# Altium PCB board.PcbDoc (part 1 of 2)
Units mil, origin at the board's own origin, x right, y up, seen from the top; angles counter-clockwise.
Board outline 2780 x 1500 mil, 6 copper layers (Top Layer, Mid Layer 1, Mid Layer 2, Mid Layer 3, Mid Layer 4, Bottom Layer), stack 60.566 mil thick; 88 components, 67 nets, 504 pads, 102 vias.
Unrouted connection lines stored in the file: 21.
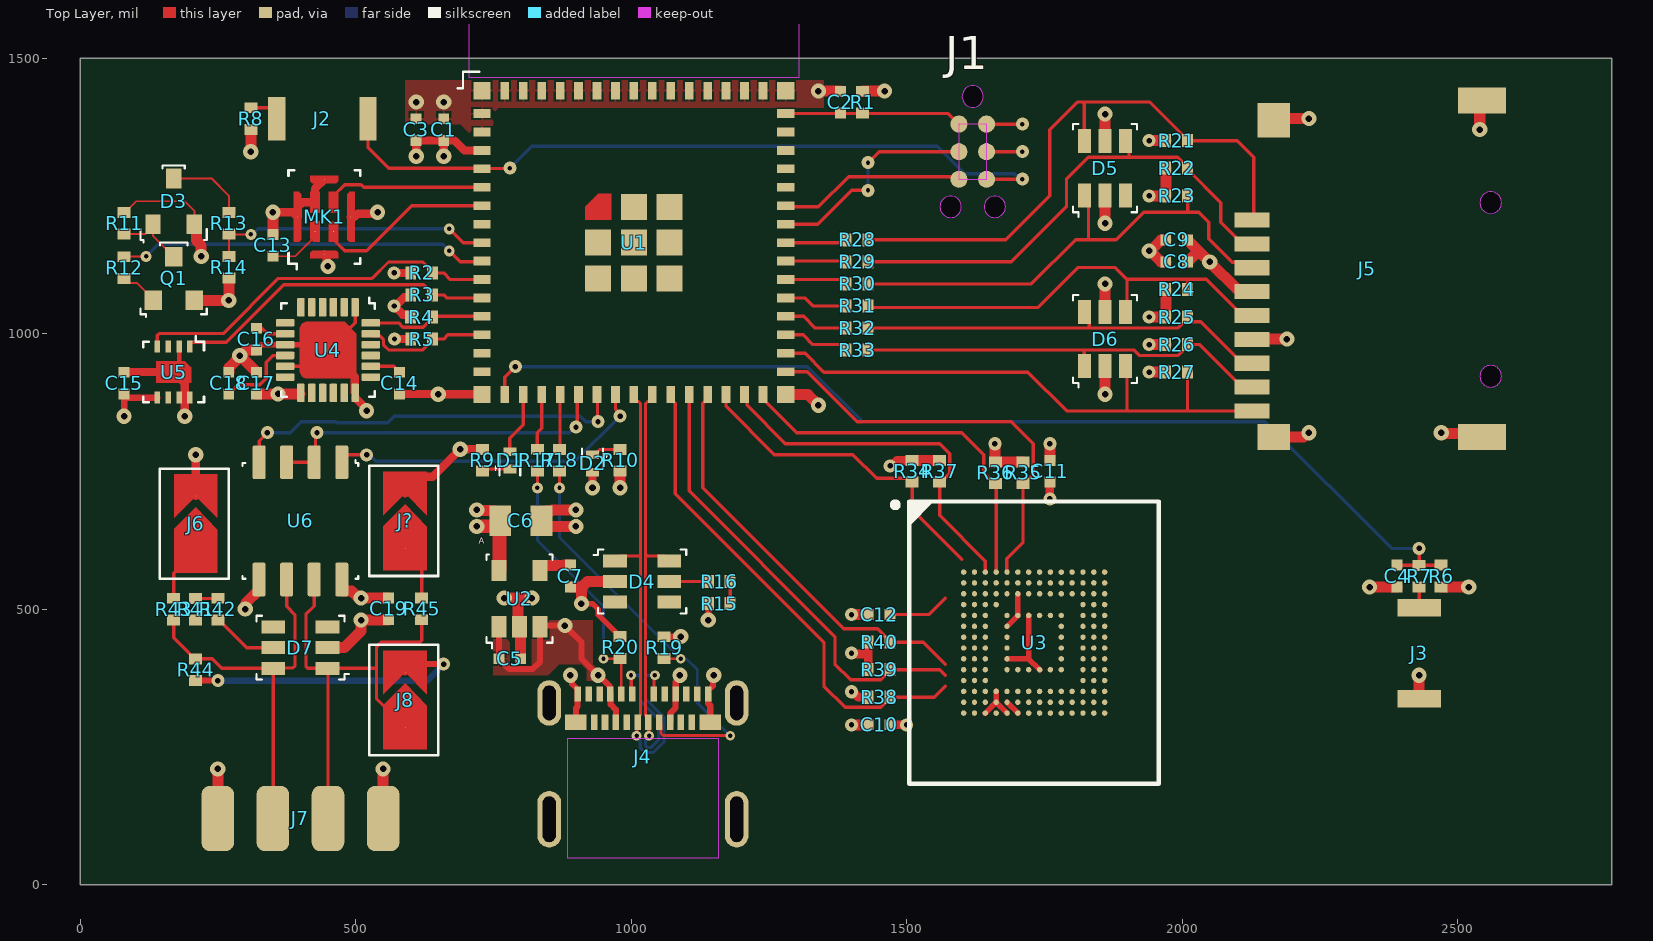
[diagram p0: Top Layer view]
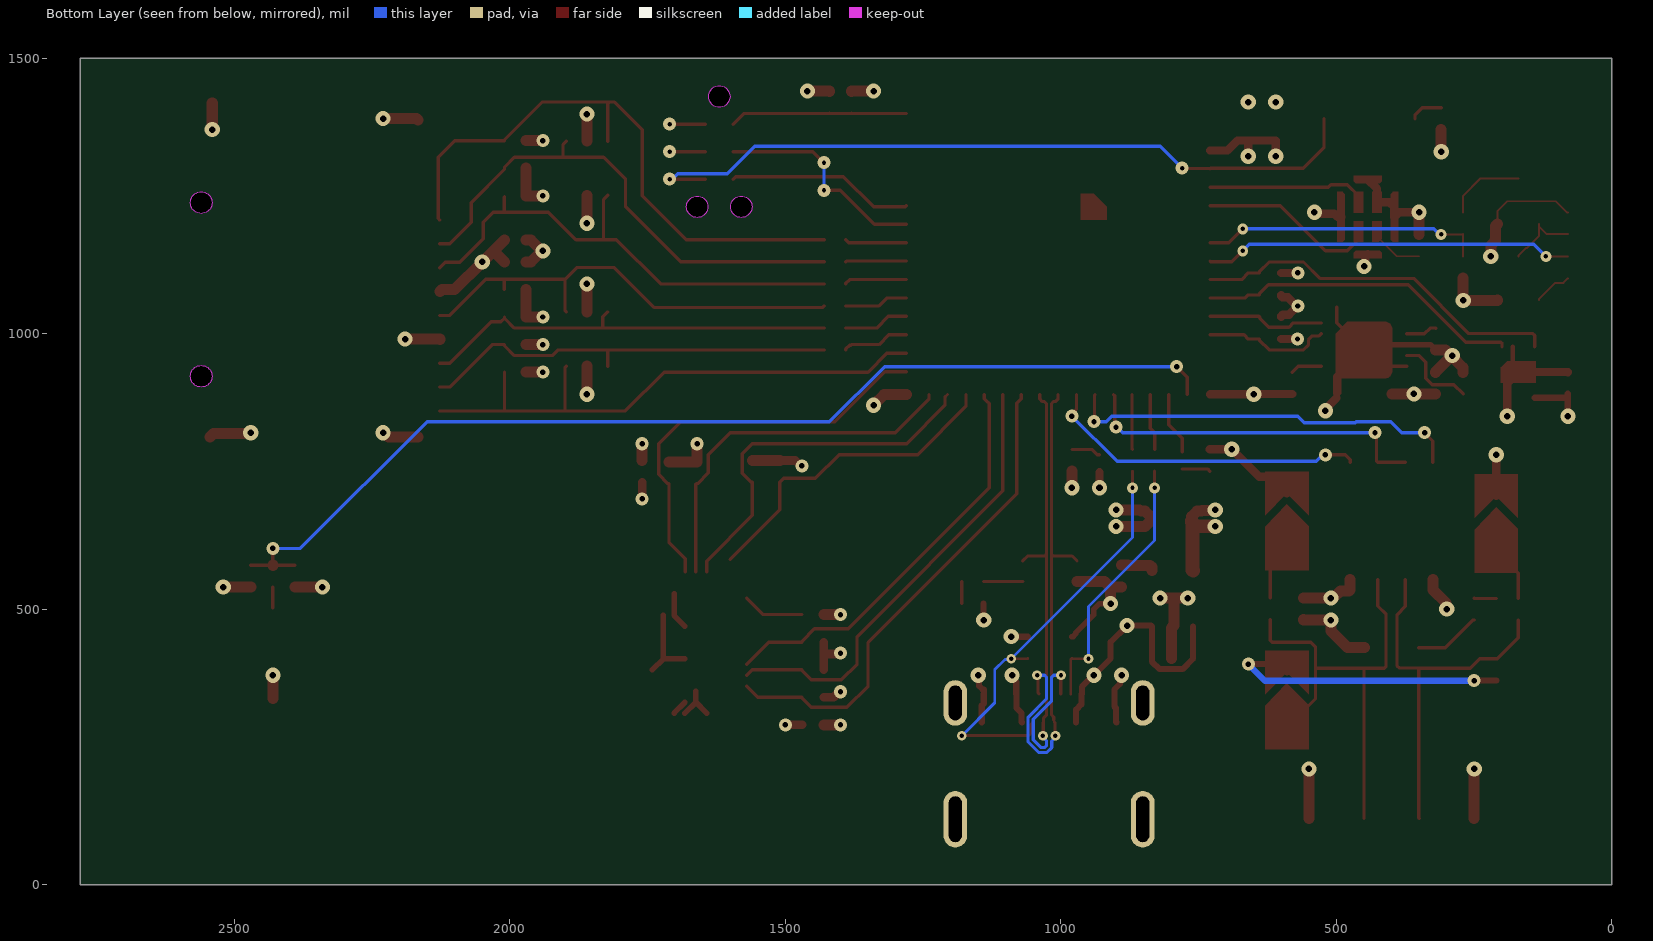
[diagram p1: Bottom Layer view, seen from below]
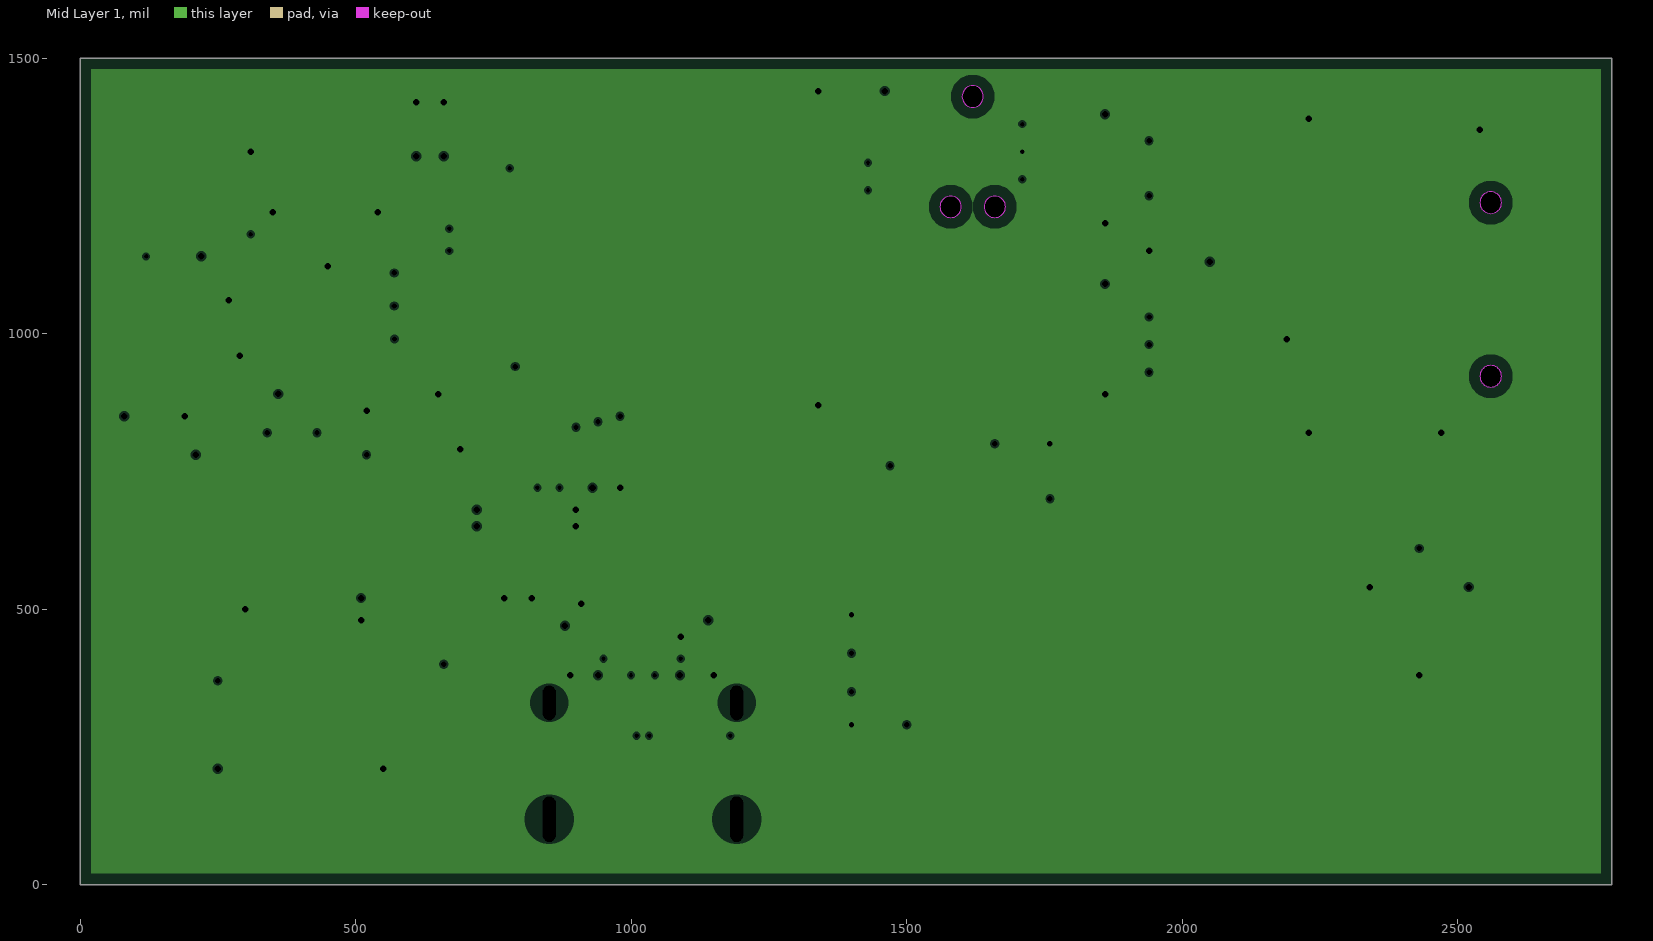
[diagram p2: Mid Layer 1, clearances drawn from the general rule]
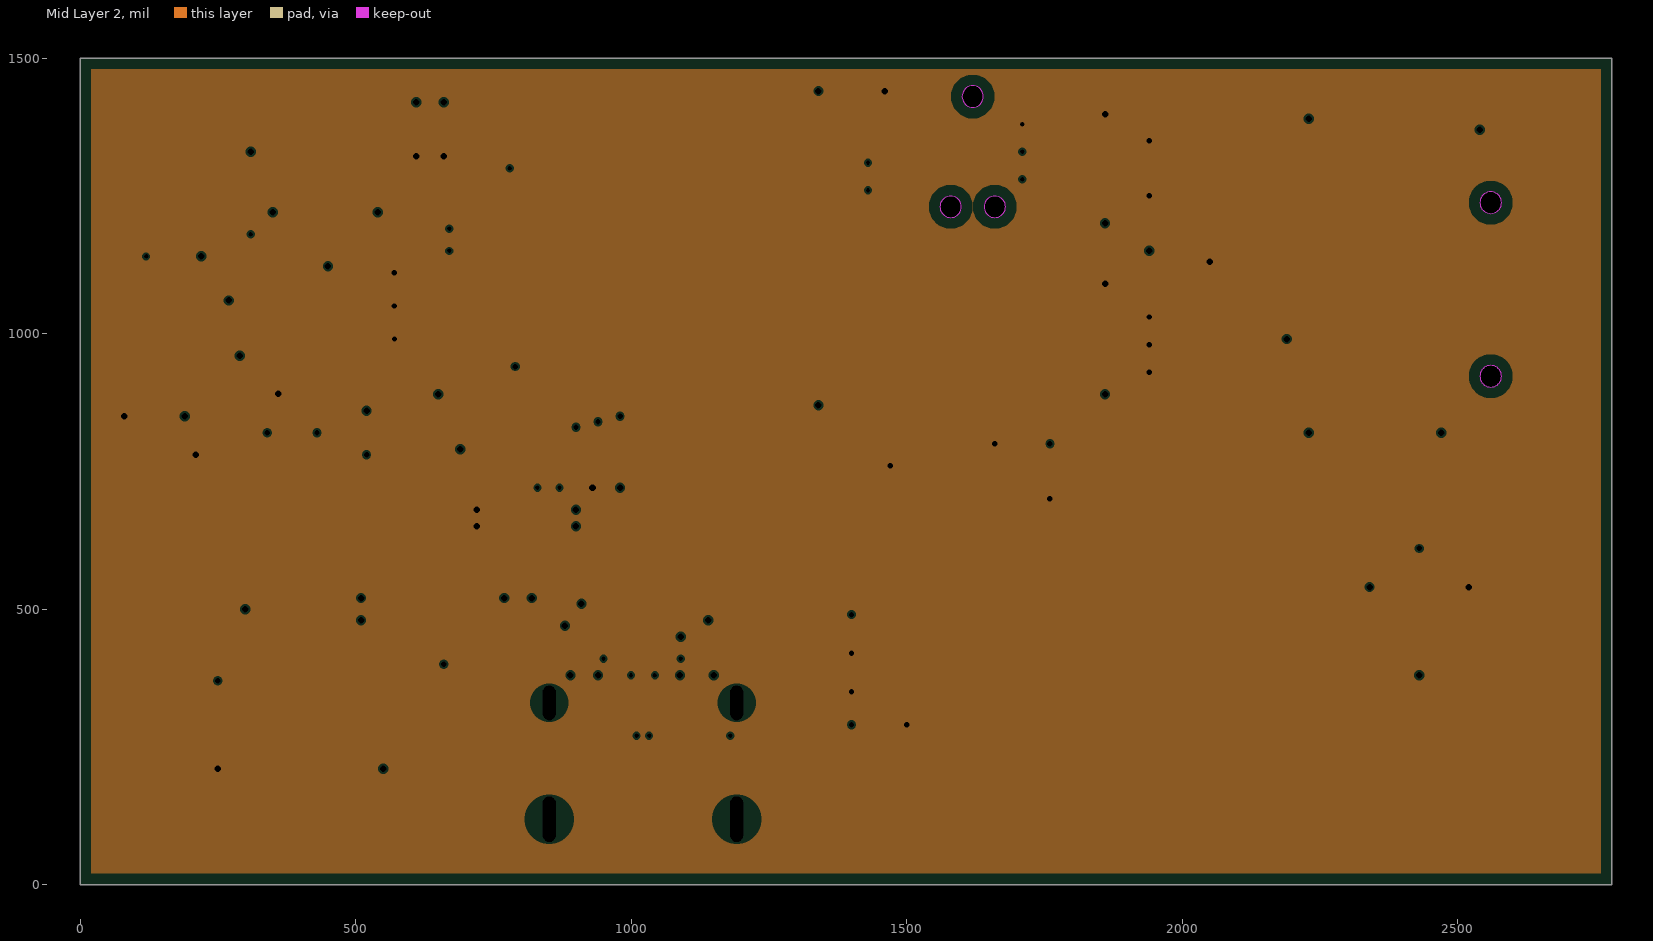
[diagram p3: Mid Layer 2, clearances drawn from the general rule]
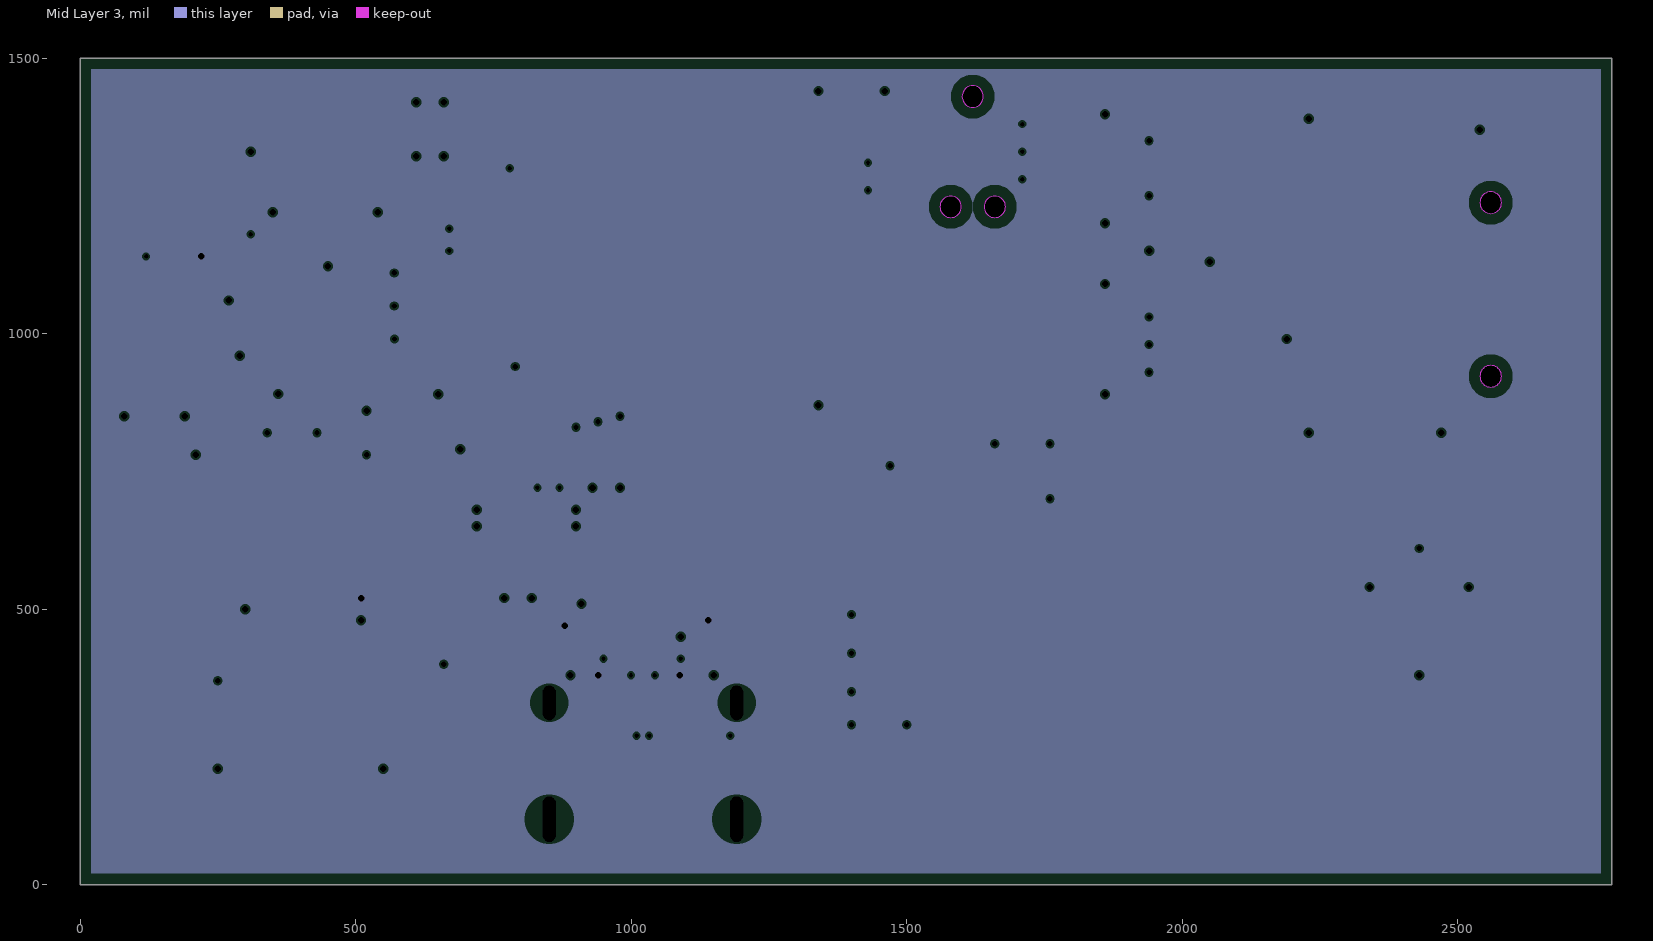
[diagram p4: Mid Layer 3, clearances drawn from the general rule]
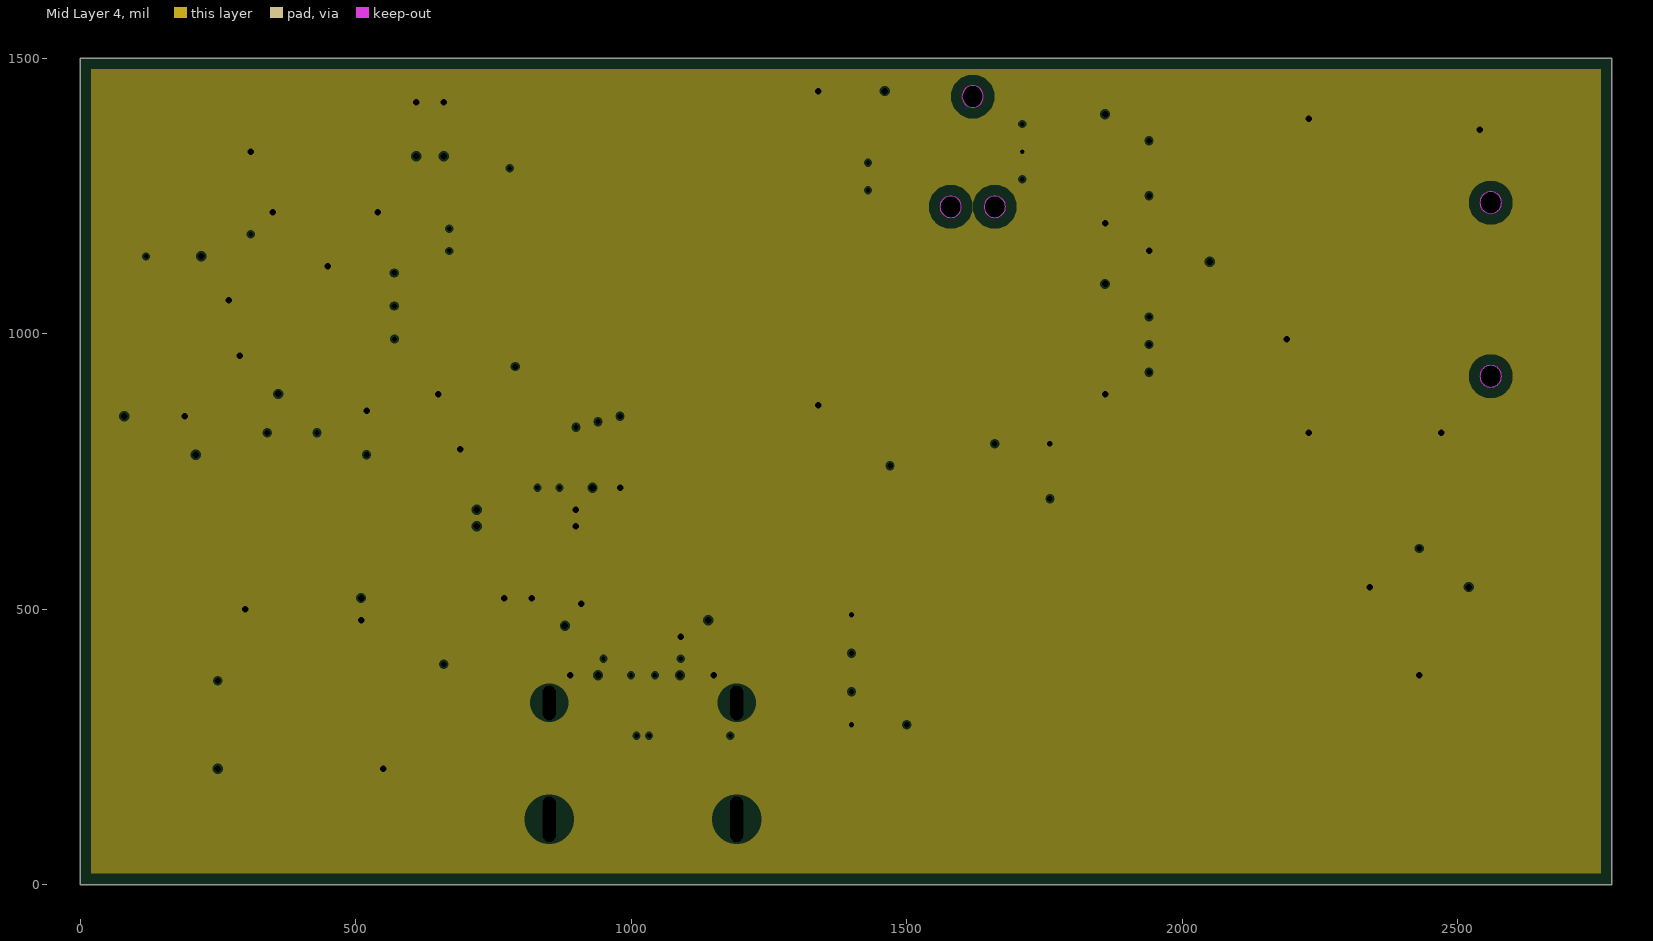
[diagram p5: Mid Layer 4, clearances drawn from the general rule]
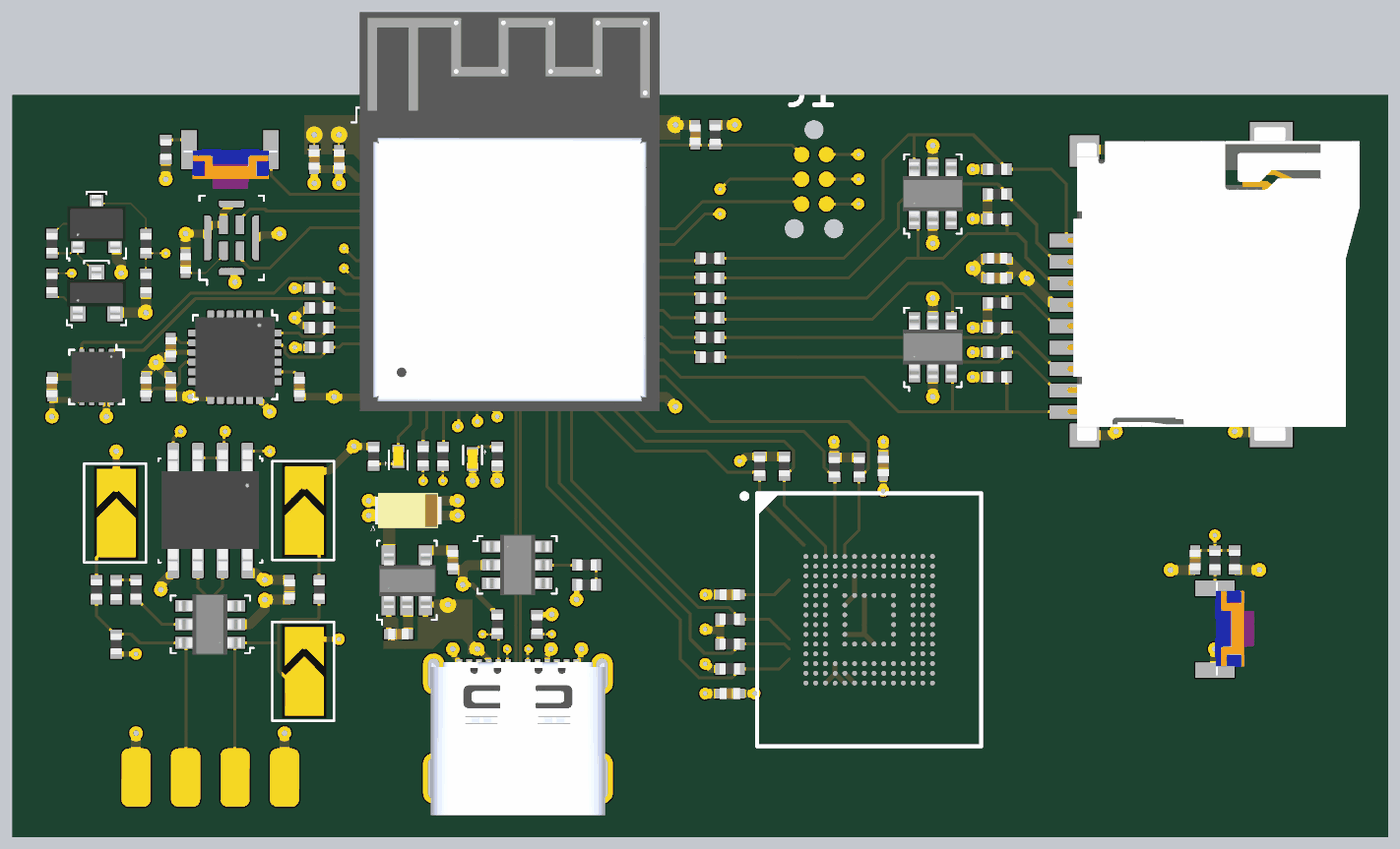
[diagram p6: 3D render of the assembled board from above, using the file's embedded part models]

## Layer stack, top to bottom
Top Solder: solder mask 0.5, Solder Resist, Dk 3.8
Top Layer: signal copper 1.378
Dielectric 1: prepreg 3.913, 2313, Dk 4.05
Mid Layer 1: plane copper 0.598, net GND
Core 1: core 21.6539, FR-4, Dk 4.5
Mid Layer 2: plane copper 0.598, net +3.3
Dielectric 2: prepreg 4.2839, 2116, Dk 4.25
Mid Layer 3: plane copper 0.598, net VBUS
Core 2: core 21.6539, FR-4, Dk 4.5
Mid Layer 4: plane copper 0.598, net GND
Dielectric 3: prepreg 3.913, 2313, Dk 4.05
Bottom Layer: signal copper 1.378
Bottom Solder: solder mask 0.5, Solder Resist, Dk 3.8

## Board outline
0,0 2780,0 2780,1500 0,1500

## Design rules (kind name [scope] priority, off if disabled: settings)
BoardOutlineClearance [All] p1: gap=7.87 ignorepadtopadclearanceinfootprint=FALSE
Clearance [All] p1: gap=3.5 ignorepadtopadclearanceinfootprint=FALSE except(5: Arc-Via Track-Via SMDPad-Via THPad-Via Via-Via Via-Fill Via-Poly Via-Region Via-Text; 9.84: Arc-Hole Track-Hole SMDPad-Hole THPad-Hole Via-Hole Fill-Hole Poly-Hole Region-Hole Text-Hole)
ComponentClearance [All] p1: gap=3.5 collisioncheckmode=3 verticalgap=3.5 showdistances=TRUE
DiffPairsRouting [All] p1: maxlimit=3.5 minlimit=3.5 mostfreqgap=3.5 toplayer_minwidth=3.5 toplayer_maxwidth=71497.94 toplayer_prefwidth=3.5 bottomlayer_minwidth=3.5 bottomlayer_maxwidth=71497.94 bottomlayer_prefwidth=3.5 maxuncoupledlength=500
Height [All] p1: minheight=0 maxheight=71497.94 prefheight=500
HoleSize [All] p1: absolutevalues=TRUE maxlimit=248.03 minlimit=7.87 maxpercent=80.000 minpercent=20.000
HoleToHoleClearance [All] p1: gap=9.84 allowstackedmicrovias=FALSE
MinimumAnnularRing [All] p1: minimumring=3
MinimumSolderMaskSliver [All] p1: minsoldermaskwidth=0
PlaneClearance [All] p1: clearance=3.5
PlaneConnect PlaneConnectPowerPads [InPadClass('PowerPads')] p1: planeconnectstyle=Direct reliefexpansion=20 reliefentries=4 reliefconductorwidth=10 reliefairgap=10
PlaneConnect [All] p2: pad.planeconnectstyle=Relief pad.reliefexpansion=11.81 pad.reliefentries=4 pad.reliefconductorwidth=3.5 pad.reliefairgap=3.5 via.planeconnectstyle=Direct via.reliefexpansion=11.81 via.reliefentries=4 via.reliefconductorwidth=5 via.reliefairgap=5
PolygonConnect PolygonConnectPowerPads [All vs (InPadClass('PowerPads'))] p1: connectstyle=Direct reliefconductorwidth=10 reliefentries=4 polygonreliefangle="90 Angle" airgapwidth=10
PolygonConnect [All] p2: thpad.connectstyle=Relief thpad.reliefconductorwidth=3.5 thpad.reliefentries=4 thpad.polygonreliefangle="90 Angle" thpad.airgapwidth=3.5 smdpad.connectstyle=Relief smdpad.reliefconductorwidth=3.5 smdpad.reliefentries=4 smdpad.polygonreliefangle="90 Angle" smdpad.airgapwidth=3.5 via.connectstyle=Direct via.reliefconductorwidth=5 via.reliefentries=4 via.polygonreliefangle="90 Angle" via.airgapwidth=5
RoutingVias [All] p1: holewidth=7.87 width=17.72 viastyle="Through Hole" minholewidth=7.87 minwidth=17.72 maxholewidth=248.03 maxwidth=257.87
SilkToSilkClearance [All] p1: silktosilkclearance=0
SilkToSolderMaskClearance [IsPad] p1: minsilkscreentomaskgap=3.5 clearancetoexposedcopper=TRUE
SolderMaskExpansion [All] p1: expansion=2.95 istentingtop=FALSE
Width [All] p1: maxlimit=71497.94 minlimit=3.5 preferedwidth=3.5
20 further rules are at their usual default settings.

## Classes and differential pairs
component class USB: D4 J4 R15 R16 R17 R18 R19 R20
component class Sensors: C14 C15 C16 C17 C18 U4 U5
component class SD-eMMC: C8 C9 C10 C11 C12 D5 D6 J5 R21 R22 R23 R24 R25 R26 R27 R28 R29 R30 R31 R32 R33 R34 R35 R36 R37 R38 R39 R40 U3
component class RS-485: C19 D7 J6 J7 J8 J? R41 R42 R43 R44 R45 U6
component class Power: C5 C6 C7 D2 D3 Q1 R10 R11 R12 R13 R14 U2
component class MIC: C13 MK1
component class MCU: C1 C2 C3 C4 D1 J1 J2 J3 R1 R2 R3 R4 R5 R6 R7 R8 R9 U1
differential pair USB_D: +USB_D_P -USB_D_N

## Components (designator, comment, footprint, x,y, rotation, side; value= is the part's Value field where it differs from the comment)
C1 "C 22u 0402 J" C0402 660,1370 r90 top
C2 "C 1uF 0402 J" C0402 1380,1420 r270 top
C3 "C 22u 0402 J" C0402 610,1370 r90 top
C4 "C 0.1u 0402 J" C0402 2390,560 r90 top
C5 "C 0.1u 0402 J" C0402 780,410 r180 top
C6 "C 1uF Tant J" "C AVX CAP TANT CASE A" 800,660 r0 top
C7 "C 10nF 0402 J" C0402 890,560 r90 top
C8 "C 22u 0402 J" C0402 1990,1130 r0 top
C9 "C 22u 0402 J" C0402 1990,1170 r0 top
C10 "C 22u 0402 J" C0402 1450,290 r0 top
C11 "C 22u 0402 J" C0402 1760,750 r270 top
C12 "C 0.1u 0402 J" C0402 1450,490 r0 top
C13 "C 22u 0402 J" C0402 350,1160 r270 top
C14 "C 2.2nF 0402 50V X7R J" C0402 580,910 r270 top
C15 "C 0.1u 0402 J" C0402 80,910 r270 top
C16 "C 0.1u 0402 J" C0402 320,990 r270 top
C17 "C 10nF 0402 J" C0402 320,910 r270 top
C18 "C 0.1u 0402 J" C0402 270,910 r270 top
C19 "C 22u 0402 J" C0402 560,500.32 r270 top
D1 "D GREEN LED J" NCD0402C1 780,770 r90 top
D2 "D GREEN LED J" NCD0402C1 930,764.25 r270 top
D3 "D MOS RQ5A025ZPTL" "SC96 SOT346T" 170,1240 r0 top
D4 "Protection diodes" SOT23-SRV05 1020,550 r270 top
D5 "Protection diodes" SOT23-SRV05 1860,1300 r0 top
D6 "Protection diodes" SOT23-SRV05 1860,990 r0 top
D7 "Protection diodes" SOT23-SRV05 400,430 r90 top
J1 "J TAG CONNECT 2030 6P" TAG-CONNECT-6 1620,1330 r270 top
J2 "J BUT 2 J" "ALPSALPINE BUTTON" 440,1390 r0 top
J3 "J BUT 2 J" "ALPSALPINE BUTTON" 2430,420 r90 top
J4 "J USB-C J" "MOLEX USB-C 1054500101" 1021.57,329.68 r0 top
J5 "J SD via JLCPCB" "SOFNG TF-15X15 SD JLCPCB" 2560,1080 r90 top
J6 "J SOLDER JUMPER" SOLDER_JUMPER 210,660 r90 top
J7 "J 4P SOLDER" "4P SOLDER BRIDGE" 400,120 r180 top
J8 "J SOLDER JUMPER" SOLDER_JUMPER 590,340 r90 top
J? "J SOLDER JUMPER" SOLDER_JUMPER 590,665 r90 top
MK1 "MK Mic I2S J" "MK WMM7040DTHN0" 443.27,1211.57 r0 top
Q1 "D MMBT2222LT1G" SOT23 170,1100 r0 top
R1 "R 10K 0402 J" R0402 1420,1420 r90 top
R2 "R 10K 0402 J" R0402 620,1110 r180 top
R3 "R 10K 0402 J" R0402 620,1070 r180 top
R4 "R 10K 0402 J" R0402 619.68,1030 r180 top
R5 "R 10K 0402 J" R0402 620,990 r180 top
R6 "R 10K 0402 J" R0402 2470,560 r270 top
R7 "R 1K 0402 J" R0402 2430,559.68 r90 top
R8 "R 10K 0402 J" R0402 310,1390 r90 top
R9 "R 150 0402 J" R0402 730,770 r270 top
R10 "R 150 0402 J" R0402 980,770 r90 top
R11 "R 10K 0402 J" R0402 80,1200 r90 top
R12 "R 1K 0402 J" R0402 80,1119.69 r270 top
R13 "R 10K 0402 J" R0402 270,1200 r90 top
R14 "R 10K 0402 J" R0402 270,1120.31 r90 top
R15 "R 49.9K 0402 J" R0402 1160,510 r180 top
R16 "R 49.9K 0402 J" R0402 1160,550 r0 top
R17 "R 0 ohm 0402 J" R0402 830,770.31 r90 top
R18 "R 0 ohm 0402 J" R0402 870,770 r90 top
R19 "R 5.1k 0402 J" R0402 1060,430 r270 top
R20 "R 5.1k 0402 J" R0402 980,430.32 r270 top
R21 "R 10K 0402 J" R0402 1990,1350 r180 top
R22 "R 10K 0402 J" R0402 1990,1300 r180 top
R23 "R 10K 0402 J" R0402 1990,1250 r180 top
R24 "R 10K 0402 J" R0402 1990,1080 r180 top
R25 "R 10K 0402 J" R0402 1990,1030 r180 top
R26 "R 10K 0402 J" R0402 1990,980 r180 top
R27 "R 10K 0402 J" R0402 1990,930 r180 top
R28 "R 15 0402 J" R0402 1410,1170 r180 top
R29 "R 15 0402 J" R0402 1410,1130 r180 top
R30 "R 15 0402 J" R0402 1410,1090 r180 top
R31 "R 15 0402 J" R0402 1410,1050 r180 top
R32 "R 15 0402 J" R0402 1410,1010 r180 top
R33 "R 15 0402 J" R0402 1410,970 r180 top
R34 "R 10K 0402 J" R0402 1510,750 r90 top
R35 "R 10K 0402 J" R0402 1711.26,747.48 r90 top
R36 "R 10K 0402 J" R0402 1661.26,747.48 r90 top
R37 "R 10K 0402 J" R0402 1560,750 r90 top
R38 "R 10K 0402 J" R0402 1450,340 r0 top
R39 "R 10K 0402 J" R0402 1450,390 r180 top
R40 "R 10K 0402 J" R0402 1450,440 r0 top
R41 "R 49.9K 0402 J" R0402 210,499.68 r270 top
R42 "R 49.9K 0402 J" R0402 250,500 r90 top
R43 "R 10K 0402 J" R0402 170,500 r90 top
R44 "R 100 0402 J" R0402 210,390 r90 top
R45 "R 10K 0402 J" R0402 620,500.32 r270 top
U1 "U ESP32-S3-MINI-1-N8" ESP-S3-MINI 1005.04,1164.96 r270 top
U2 "SPX3819M5-L-3-3/TR" SOT23-5 797.4,519.02 r0 top
U3 "U Samsung eMMC J 16Gb" BGA153C50P14X14_1150X1300X92 1731.42,439.21 r0 top
U4 "U MPU-6050 J" MPU-6050 450,970 r180 top
U5 "U SHT30-DIS-B2.5KS J" SHT30 170,930 r180 top
U6 "U RS485 MAX3485EESA+ J" "SOIC8 - V2" 400,660 r180 top

## Footprints (in the part's own frame and the unit in brackets; to place one, negate y for a bottom-side part, rotate by r counter-clockwise, add the part's x,y. Pads: shape width x height; smd on the part's side, far side on the other; paste and mask are expansions set on the pad)
"4P SOLDER BRIDGE" [mm]
  rrect50% 1.5x3 smd paste-1: 1(-3.81,0) 2(-1.27,0) 3(1.27,0) 4(3.81,0)
"ALPSALPINE BUTTON" [mm]
  rect 0.8x2 smd: 1(-2.1,0) 2(2.1,0)
  body extent -2.37,-1.45 2.43,1.45, height 2
BGA153C50P14X14_1150X1300X92 [mm] "BGA, 153-Leads, Body 11,50x13,00mmx0,92mm, Pitch 0,50mm"
  round 0.25 smd mask-0.31: A1(-3.25,3.25) A2(-2.75,3.25) A3(-2.25,3.25) A4(-1.75,3.25) A5(-1.25,3.25) A6(-0.75,3.25) A7(-0.25,3.25) A8(0.25,3.25) A9(0.75,3.25) A10(1.25,3.25) A11(1.75,3.25) A12(2.25,3.25) A13(2.75,3.25) A14(3.25,3.25) B1(-3.25,2.75) B2(-2.75,2.75) B3(-2.25,2.75) B4(-1.75,2.75) B5(-1.25,2.75) B6(-0.75,2.75) B7(-0.25,2.75) B8(0.25,2.75) B9(0.75,2.75) B10(1.25,2.75) B11(1.75,2.75) B12(2.25,2.75) B13(2.75,2.75) B14(3.25,2.75) C1(-3.25,2.25) C2(-2.75,2.25) C3(-2.25,2.25) C4(-1.75,2.25) C5(-1.25,2.25) C6(-0.75,2.25) C7(-0.25,2.25) C8(0.25,2.25) C9(0.75,2.25) C10(1.25,2.25) C11(1.75,2.25) C12(2.25,2.25) C13(2.75,2.25) C14(3.25,2.25) D1(-3.25,1.75) D2(-2.75,1.75) D3(-2.25,1.75) D4(-1.75,1.75) D12(2.25,1.75) D13(2.75,1.75) D14(3.25,1.75) E1(-3.25,1.25) E2(-2.75,1.25) E3(-2.25,1.25) E5(-1.25,1.25) E6(-0.75,1.25) E7(-0.25,1.25) E8(0.25,1.25) E9(0.75,1.25) E10(1.25,1.25) E12(2.25,1.25) E13(2.75,1.25) E14(3.25,1.25) F1(-3.25,0.75) F2(-2.75,0.75) F3(-2.25,0.75) F5(-1.25,0.75) F10(1.25,0.75) F12(2.25,0.75) F13(2.75,0.75) F14(3.25,0.75) G1(-3.25,0.25) G2(-2.75,0.25) G3(-2.25,0.25) G5(-1.25,0.25) G10(1.25,0.25) G12(2.25,0.25) G13(2.75,0.25) G14(3.25,0.25) H1(-3.25,-0.25) H2(-2.75,-0.25) H3(-2.25,-0.25) H5(-1.25,-0.25) H10(1.25,-0.25) H12(2.25,-0.25) H13(2.75,-0.25) H14(3.25,-0.25) J1(-3.25,-0.75) J2(-2.75,-0.75) J3(-2.25,-0.75) J5(-1.25,-0.75) J10(1.25,-0.75) J12(2.25,-0.75) J13(2.75,-0.75) J14(3.25,-0.75) K1(-3.25,-1.25) K2(-2.75,-1.25) K3(-2.25,-1.25) K5(-1.25,-1.25) K6(-0.75,-1.25) K7(-0.25,-1.25) K8(0.25,-1.25) K9(0.75,-1.25) K10(1.25,-1.25) K12(2.25,-1.25) K13(2.75,-1.25) K14(3.25,-1.25) L1(-3.25,-1.75) L2(-2.75,-1.75) L3(-2.25,-1.75) L12(2.25,-1.75) L13(2.75,-1.75) L14(3.25,-1.75) M1(-3.25,-2.25) M2(-2.75,-2.25) M3(-2.25,-2.25) M4(-1.75,-2.25) M5(-1.25,-2.25) M6(-0.75,-2.25) M7(-0.25,-2.25) M8(0.25,-2.25) M9(0.75,-2.25) M10(1.25,-2.25) M11(1.75,-2.25) M12(2.25,-2.25) M13(2.75,-2.25) M14(3.25,-2.25) N1(-3.25,-2.75) N2(-2.75,-2.75) N3(-2.25,-2.75) N4(-1.75,-2.75) N5(-1.25,-2.75) N6(-0.75,-2.75) N7(-0.25,-2.75) N8(0.25,-2.75) N9(0.75,-2.75) N10(1.25,-2.75) N11(1.75,-2.75) N12(2.25,-2.75) N13(2.75,-2.75) N14(3.25,-2.75) P1(-3.25,-3.25) P2(-2.75,-3.25) P3(-2.25,-3.25) P4(-1.75,-3.25) P5(-1.25,-3.25) P6(-0.75,-3.25) P7(-0.25,-3.25) P8(0.25,-3.25) P9(0.75,-3.25) P10(1.25,-3.25) P11(1.75,-3.25) P12(2.25,-3.25) P13(2.75,-3.25) P14(3.25,-3.25)
  silkscreen extent -6.52,-6.5 5.75,6.5, body extent -5.75,-6.5 5.75,6.5, height 0.92
C0402 [mm]
  rect 0.5x0.5 smd: 1(-0.5,0) 2(0.5,0)
  body extent -0.52,-0.28 0.52,0.28, height 0.56
"C AVX CAP TANT CASE A" [mm]
  rect 1x1.4 smd: A(-0.95,0) K(0.95,0)
  body extent -1.7,-0.9 1.7,0.9, height 1.85
ESP-S3-MINI [mm]
  rect 0.4x0.8 smd: 1(-5.95,-7) 2(-5.1,-7) 3(-4.25,-7) 4(-3.4,-7) 5(-2.55,-7) 6(-1.7,-7) 7(-0.85,-7) 8(0,-7) 9(0.85,-7) 10(1.7,-7) 11(2.55,-7) 12(3.4,-7) 13(4.25,-7) 14(5.1,-7) 15(5.95,-7) 31(5.95,7) 32(5.1,7) 33(4.25,7) 34(3.4,7) 35(2.55,7) 36(1.7,7) 37(0.85,7) 38(0,7) 39(-0.85,7) 40(-1.7,7) 41(-2.55,7) 42(-3.4,7) 43(-4.25,7) 44(-5.1,7) 45(-5.95,7)
  rect 0.8x0.4 smd: 16(7,-5.95) 17(7,-5.1) 18(7,-4.25) 19(7,-3.4) 20(7,-2.55) 21(7,-1.7) 22(7,-0.85) 23(7,0) 24(7,0.85) 25(7,1.7) 26(7,2.55) 27(7,3.4) 28(7,4.25) 29(7,5.1) 30(7,5.95) 46(-7,4.25) 46(-7,5.1) 46(-7,5.95) 46(-7,-3.4) 46(-7,-2.55) 46(-7,-1.7) 46(-7,-0.85) 46(-7,0) 46(-7,0.85) 46(-7,1.7) 46(-7,2.55) 46(-7,3.4) 46(-7,-5.95) 46(-7,-5.1) 46(-7,-4.25)
  rect 1.2x1.2 smd: 61(-1.65,1.65) 61(-1.65,0) 61(0,1.65) 61(0,0) 61(0,-1.65) 61(1.65,1.65) 61(1.65,0) 61(1.65,-1.65)
  round 0.025 smd: 61(-1.65,-1.65)
  rect 0.8x0.8 smd: 62(-7,7) 62(-7,-7) 62(7,7) 62(7,-7)
  Top Layer region: -2.25,-1.651 -1.651,-2.25 -1.05,-2.25 -1.05,-1.05 -2.25,-1.05
  Top Layer keep-out region: -12.7,-7.62 -7.62,-7.62 -7.62,7.62 -12.7,7.62
  silkscreen extent -7.87,-8.13 -7.11,-7.11, body extent -12.78,-7.7 7.73,7.7, height 2.55
"MK WMM7040DTHN0" [mil]
  round 1 smd: 1(-16.73,-26.57) 2(-16.73,26.57) 3(16.73,26.57) 4(16.73,-26.57) 5(0,-67.91) 6(-48.23,0) 7(0,67.91) 8(48.23,0)
  Top Layer region: -25.59,7.87 -25.59,45.28 -7.87,45.28 -7.87,7.87
  Top Layer region: -45.34,-45.28 -41.38,-41.32 -41.34,-41.32 -41.34,41.21 -45.34,45.17 -45.34,45.28 -55.12,45.28 -55.12,-45.28
  Top Layer region: 25.59,64.92 21.61,60.94 21.59,61.02 -21.78,61.02 -25.59,64.89 -25.59,74.8 25.59,74.8
  Top Layer region: 45.34,-45.28 41.38,-41.32 41.34,-41.32 41.34,41.21 45.34,45.17 45.34,45.28 55.12,45.28 55.12,-45.28
  Top Layer region: 25.59,-64.92 21.61,-60.94 21.59,-61.02 -21.78,-61.02 -25.59,-64.89 -25.59,-74.8 25.59,-74.8
  Top Layer region: 7.87,7.87 7.87,45.28 25.59,45.28 25.59,7.87
  Top Layer region: -25.59,-39.41 -20,-45.28 -7.87,-45.28 -7.87,-7.87 -25.59,-7.87 -25.59,-7.87
  Top Layer region: 7.87,-45.28 7.87,-7.87 25.59,-7.87 25.59,-45.28
  silkscreen extent -65,-95 65,85, body extent -60,-80 60,80, height 39
"MOLEX USB-C 1054500101" [mm]
  rrect100% 1.1x2.6 hole 0.6 slot 2.1 at 90 deg: 99(-4.32,-5.36) 99(4.32,-5.36)
  rrect100% 1.1x2.1 hole 0.6 slot 1.6 at 90 deg: 99(-4.32,0) 99(4.32,0)
  rect 0.3x0.7 smd: A1(-3,0.41) A2(-2.5,0.41) A3(-2,0.41) A4(-1.5,0.41) A5(-1,0.41) A6(-0.5,0.41) A7(0.5,0.41) A8(1,0.41) A9(1.5,0.41) A10(2,0.41) A11(2.5,0.41) A12(3,0.41) B2(2.25,-0.89) B3(1.75,-0.89) B4(1.25,-0.89) B5(0.75,-0.89) B6(0.25,-0.89) B7(-0.25,-0.89) B8(-0.75,-0.89) B9(-1.25,-0.89) B10(-1.75,-0.89) B11(-2.25,-0.89)
  rect 1x0.7 smd: B1(3.1,-0.89) B12(-3.1,-0.89)
  Top Layer keep-out region: -3.5,-7.13 3.5,-7.13 3.5,-1.651 -3.5,-1.651
  body extent -4.47,-7.26 4.47,0.64, height 3.2
MPU-6050 [mm]
  rrect25% 0.35x0.85 smd: 1(-1.25,-1.975) 2(-0.75,-1.975) 3(-0.25,-1.975) 4(0.25,-1.975) 5(0.75,-1.975) 6(1.25,-1.975) 13(1.25,1.975) 14(0.75,1.975) 15(0.25,1.975) 16(-0.25,1.975) 17(-0.75,1.975) 18(-1.25,1.975)
  rrect25% 0.85x0.35 smd: 7(1.975,-1.25) 8(1.975,-0.75) 9(1.975,-0.25) 10(1.975,0.25) 11(1.975,0.75) 12(1.975,1.25) 19(-1.973,1.25) 20(-1.973,0.75) 21(-1.973,0.25) 22(-1.973,-0.25) 23(-1.973,-0.75) 24(-1.973,-1.25)
  round 0.025 smd paste-2539.97 mask+0.102: 25(0,0)
  Top Layer region: -0.762,-1.3 -1.3,-0.762 -1.3,0.975 -1.275,1.099 -1.205,1.205 -1.099,1.275 -0.975,1.3 -0.975,1.3 0.975,1.3 1.099,1.275 1.205,1.205 1.275,1.099 1.3,0.975 1.3,0.975 1.3,-0.975 1.275,-1.099 1.205,-1.205 1.099,-1.275 0.975,-1.3 0.975,-1.3
  silkscreen extent -2.16,-2.41 2.16,2.16, body extent -2.05,-2.05 2.04,2.04, height 0.94
NCD0402C1 [mm]
  rect 0.4x0.6 smd: 1(-0.4,0) 2(0.4,0)
  silkscreen extent -0.69,-0.48 0.28,0.7, body extent -0.5,-0.25 0.5,0.25, height 0.32
R0402 [mm]
  rect 0.5x0.6 smd: 1(-0.5,0) 2(0.5,0)
  body extent -0.52,-0.28 0.52,0.28, height 0.41
"SC96 SOT346T" [mm]
  rect 0.7x0.9 smd: 1(-0.95,-1.05) 2(0.95,-1.05) 3(0,1.05)
  silkscreen extent -1.52,-1.91 1.52,1.65, body extent -1.5,-1.5 1.5,1.5, height 0.99
SHT30 [mm]
  rect 0.25x0.55 smd: 1(-0.75,-1.175) 2(-0.25,-1.175) 3(0.25,-1.175) 4(0.75,-1.175) 5(0.75,1.175) 6(0.25,1.175) 7(-0.25,1.175) 8(-0.75,1.175)
  round 0.025 smd: DP(0,0)
  Top Layer region: -0.8,-0.229 -0.787,-0.229 -0.508,-0.5 0.8,-0.5 0.8,0.5 -0.8,0.5
  silkscreen extent -1.4,-1.65 1.4,1.4, body extent -1.31,-1.3 1.28,1.29, height 0.99
"SOFNG TF-15X15 SD JLCPCB" [mm]
  rect 0.7x1.6 smd: 1(3.2,11) 2(2.1,11) 3(1,11) 4(-0.1,11) 5(-1.2,11) 6(-2.3,11) 7(-3.4,11) 8(-4.5,11) Cd(-5.6,11)
  rect 1.2x2.2 smd: CASE(-6.8,0.4) CASE(8.7,0.4)
  rect 1.2x1.5 smd: CASE(-6.8,10)
  rect 1.6x1.5 smd: CASE(7.8,10)
  Keep-Out Layer board cut-out: -4.5,0 -4.462,-0.191 -4.354,-0.354 -4.191,-0.462 -4,-0.5 -4,-0.5 -3.809,-0.462 -3.646,-0.354 -3.538,-0.191 -3.5,0 -3.5,0 -3.538,0.191 -3.646,0.354 -3.809,0.462 -4,0.5 -4,0.5 -4.191,0.462 -4.354,0.354 -4.462,0.191 -4.5,0
  Keep-Out Layer board cut-out: 3.5,0 3.538,-0.191 3.646,-0.354 3.809,-0.462 4,-0.5 4,-0.5 4.191,-0.462 4.354,-0.354 4.462,-0.191 4.5,0 4.5,0 4.462,0.191 4.354,0.354 4.191,0.462 4,0.5 4,0.5 3.809,0.462 3.646,0.354 3.538,0.191 3.5,0
  body extent -7.08,-4.12 9.02,10.88, height 1.93
"SOIC8 - V2" [mm]
  rrect25% 0.6x1.55 smd: 1(-1.905,-2.7) 2(-0.635,-2.7) 3(0.635,-2.7) 4(1.905,-2.7) 5(1.905,2.7) 6(0.635,2.7) 7(-0.635,2.7) 8(-1.905,2.7)
  silkscreen extent -2.67,-2.79 2.67,2.67, body extent -2.5,-3.11 2.51,3.08, height 1.76
SOLDER_JUMPER [mil]
  round 1 smd paste-99999: 1(-55,0) 2(45,0)
  Top Layer region: 5.63,39.37 45,0 5.63,-39.37 84.37,-39.37 84.37,39.37
  Top Layer region: -14.37,39.37 25,0 -15.63,-39.37 -94.37,-39.37 -94.37,39.37 -94.37,39.37
  silkscreen extent -105,-60 95,65
SOT23 [mm]
  rect 0.8x0.9 smd: 1(-0.95,-1) 2(0.95,-1) 3(0,1)
  silkscreen extent -1.52,-1.78 1.52,1.65, body extent -1.52,-1.32 1.52,1.32, height 1.12
SOT23-5 [mm]
  rect 0.69x0.99 smd: 1(-0.95,-1.295) 2(0,-1.295) 3(0.95,-1.295) 4(0.95,1.295) 5(-0.95,1.295)
  silkscreen extent -1.52,-2.29 1.52,2.03, body extent -1.43,-1.42 1.46,1.37, height 1.45
SOT23-SRV05 [mm]
  rect 0.6x1.1 smd: 1(-0.95,-1.25) 2(0,-1.25) 3(0.95,-1.25) 4(0.95,1.25) 5(0,1.25) 6(-0.95,1.25)
  silkscreen extent -1.47,-2.24 1.47,2.03, body extent -1.55,-1.58 1.55,1.62, height 1.45
TAG-CONNECT-6 [mil]
  round 30.98 smd paste-39.37: 1(-50,-25) 2(-50,25) 3(0,-25) 4(0,25) 5(50,-25) 6(50,25)
  Top Layer keep-out region: -50,-25 50,-25 50,25 -50,25
  Keep-Out Layer board cut-out: 80.49,-40 81.98,-47.47 86.21,-53.79 92.53,-58.02 100,-59.51 100,-59.51 107.47,-58.02 113.79,-53.79 118.02,-47.47 119.51,-40 119.51,-40 118.02,-32.53 113.79,-26.21 107.47,-21.98 100,-20.49 100,-20.49 92.53,-21.98 86.21,-26.21 81.98,-32.53 80.49,-40
  Keep-Out Layer board cut-out: 80.49,40 81.98,32.53 86.21,26.21 92.53,21.98 100,20.49 100,20.49 107.47,21.98 113.79,26.21 118.02,32.53 119.51,40 119.51,40 118.02,47.47 113.79,53.79 107.47,58.02 100,59.51 100,59.51 92.53,58.02 86.21,53.79 81.98,47.47 80.49,40
  Keep-Out Layer board cut-out: -119.51,0 -118.02,-7.47 -113.79,-13.79 -107.47,-18.02 -100,-19.51 -100,-19.51 -92.53,-18.02 -86.21,-13.79 -81.98,-7.47 -80.49,0 -80.49,0 -81.98,7.47 -86.21,13.79 -92.53,18.02 -100,19.51 -100,19.51 -107.47,18.02 -113.79,13.79 -118.02,7.47 -119.51,0

## Part data
C1 C3 C8 C9 C10 C11 C13 C19: "Multi-Layer Ceramic Capacitor 22uF 2.5VDC X6S 20% 0402 Paper T/R GRM155C80E226ME11D", JLCPCB=C907955, Manufacturer=Murata, Manufacturer Part Number=GRM155C80E226ME11D, Supplier Part Number 1=81-GRM155C80E226ME1D, Category="Ceramic Capacitors", Pricing 1="1=0,32000, 10=0,22300, 50=0,22300, 100=0,13400, 1000=0,08500, 10000=0,06900 (USD)", RoHS=Yes, Stock 1=30000, Supplier 1=Mouser
C2: "Ceramic capacitor SMD 0402 - 1000nF, 10V, +-10%, X5R CL05A105KP5NNNC", Capacitance=1uF, Case Code (Imperial)=0402, Case Code (Metric)=1005, Dielectric=X5R, JLCPCB=C14445, Manufacturer=Samsung, Manufacturer Part Number=CL05A105KP5NNNC, Max Operating Temperature=85°C, Min Operating Temperature=-55°C, Package Quantity=1, Tolerance=10%, Voltage Rating=10V, Case/Package=0402, Category="Ceramic Capacitors", ComponentLink1Description=http://www.farnell.com/datasheets/2710650.pdf?src-supplier=Farnell, ComponentLink1URL=http://www.farnell.com/datasheets/2710650.pdf?src-supplier=Farnell, ComponentLink2Description=http://www.samsungsem.com/kr/support/product-search/mlcc/CL05A105KP5NNNC.jsp?src-supplier=Digi-Key, ComponentLink2URL=http://www.samsungsem.com/kr/support/product-search/mlcc/CL05A105KP5NNNC.jsp?src-supplier=Digi-Key, ComponentLink3Description=http://www.farnell.com/datasheets/2710650.pdf?src-supplier=Element14, ComponentLink3URL=http://www.farnell.com/datasheets/2710650.pdf?src-supplier=Element14, Contact Plating=Tin, Depth=0.5mm, Height=0.5mm, Length=1mm, Material=Ceramic, Mount="Surface Mount", Packaging="Tape and Reel", Pricing 1="1=0,06300, 10=0,04210, 25=0,03040, 100=0,01620, 500=0,01020 (USD)", Pricing 2="1=0,10000, 10=0,03600, 50=0,01960, 100=0,01610, 500=0,01148, 1000=0,00903, 2500=0,00821, 5000=0,00755 (USD)", Pricing 3="1=0,10000, 10=0,02200, 50=0,02200, 100=0,01700, 500=0,01300, 1000=0,01000, 2500=0,00900, 10000=0,00600, 50000=0,00500 (USD)", Radiation Hardening=No, RoHS=Yes, RoHS Compliant=Yes, Series=CL, Stock 1=131, Stock 2=6411089, Stock 3=1468368, Supplier 1="Arrow Electronics", Supplier 2=Digi-Key, Supplier 3=Mouser, Supplier Part Number 1=CL05A105KP5NNNC, Supplier Part Number 2=1276-1076-1-ND, Supplier Part Number 3=187-CL05A105KP5NNNC, Thickness=0.022inch, Width=0.02inch
C4 C5 C12 C15 C16 C18: "Cap Ceramic 0.1uF 50V X7R 10% Pad SMD 0402 125C Low ESR Automotive CL05B104KB54PNC", Manufacturer=Samsung, Manufacturer Part Number=CL05B104KB54PNC, Supplier Part Number 1=1276-CL05B104KB54PNCCT-ND, Category="Ceramic Capacitors", Pricing 1="1=0,10000, 10=0,04600, 50=0,02500, 100=0,02040, 500=0,01460, 1000=0,01147, 2500=0,01043, 5000=0,00959 (USD)", RoHS=Yes, RoHS Compliant=Yes, Stock 1=3863336, Supplier 1=Digi-Key
C6: "Cap Tant Solid 1uF 16V A CASE 10%( 3.2 X 1.6 X 1.6mm) Inward L SMD 3216-18 11 Ohm 125C T/R TAJA105K016RNJ", Capacitance=1uF, Case Code (Imperial)=1206, Case Code (Metric)=3216, Dielectric Material=Tantalum, ESR (Equivalent Series Resistance)=11R, JLCPCB=C7174, Leakage Current=500nA, Manufacturer="Kyocera AVX", Manufacturer Part Number=TAJA105K016RNJ, Max Operating Temperature=125°C, Min Operating Temperature=-55°C, Package Quantity=1, Supplier Part Number 1=478-1649-2-ND, Tolerance=20%, Voltage=16V, Case/Package=1206, Category="Tantalum Capacitors", ComponentLink1Description=https://datasheet.ciiva.com/18710/taj-eng-18710647.pdf?src-supplier=Distrelec, ComponentLink1URL=https://datasheet.ciiva.com/18710/taj-eng-18710647.pdf?src-supplier=Distrelec, ComponentLink2Description=https://datasheet.ciiva.com/7832/taj-7832811.pdf?src-supplier=Element14, ComponentLink2URL=https://datasheet.ciiva.com/7832/taj-7832811.pdf?src-supplier=Element14, ComponentLink3Description=https://datasheet.ciiva.com/7832/taj-7832810.pdf?src-supplier=Element14, ComponentLink3URL=https://datasheet.ciiva.com/7832/taj-7832810.pdf?src-supplier=Element14, ComponentLink4Description=https://datasheet.ciiva.com/7832/1680476-7832431.pdf?src-supplier=Element14, ComponentLink4URL=https://datasheet.ciiva.com/7832/1680476-7832431.pdf?src-supplier=Element14, ComponentLink5Description=https://datasheet.ciiva.com/263/taj-263410.pdf?src-supplier=Digi-Key, ComponentLink5URL=https://datasheet.ciiva.com/263/taj-263410.pdf?src-supplier=Digi-Key, ComponentLink6Description=https://datasheet.ciiva.com/263/taj-263409.pdf?src-supplier=Digi-Key, ComponentLink6URL=https://datasheet.ciiva.com/263/taj-263409.pdf?src-supplier=Digi-Key, ComponentLink7Description=https://datasheet.ciiva.com/263/taj-263411.pdf?src-supplier=Digi-Key, ComponentLink7URL=https://datasheet.ciiva.com/263/taj-263411.pdf?src-supplier=Digi-Key, ComponentLink8Description=https://datasheet.ciiva.com/7832/1703059-7832429.pdf?src-supplier=Element14, ComponentLink8URL=https://datasheet.ciiva.com/7832/1703059-7832429.pdf?src-supplier=Element14, ComponentLink9Description=https://datasheet.ciiva.com/7832/1703059-7832430.pdf?src-supplier=Element14, ComponentLink9URL=https://datasheet.ciiva.com/7832/1703059-7832430.pdf?src-supplier=Element14, Depth=1.6mm, Dissipation Factor=4%, Features="General Purpose", Height=1.6mm, Height - Seated (Max)=0.071inch, Lead Free="Lead Free", Lead Pitch=1.1mm, Length=3.2mm, Mount="Surface Mount,PCB", Number of Pins=2, Packaging="Tape and Reel", Polarity=Polar, Pricing 1="2000=0,09159, 4000=0,08650, 10000=0,08141, 14000=0,07886, 50000=0,07123 (USD)", Pricing 2="20=0,28300, 100=0,27000, 200=0,25900, 500=0,23500, 1000=0,20900 (USD)", Radiation Hardening=No, REACH SVHC="No SVHC", RoHS=Yes, RoHS Compliant=Yes, Series=TAJ, Stock 1=449202, Stock 2=1, Supplier 1=Digi-Key, Supplier 2=RSComponents, Supplier Part Number 2=1360127, Termination=SMD/SMT, Voltage Rating=16V, Voltage Rating (DC)=16V, Weight=0.000571oz, Width=1.6mm
C7 C17: "Ceramic capacitor SMD-0402 10nF /50V X7R# K +-10%, Samsung, RoHS CL05B103KB5NNNC", Capacitance=10nF, Case Code (Imperial)=0402, Case Code (Metric)=1005, Dielectric=X7R, JLCPCB=C15195, Manufacturer=Samsung, Manufacturer Part Number=CL05B103KB5NNNC, Max Operating Temperature=125°C, Min Operating Temperature=-55°C, Package Quantity=1, Tolerance=10%, Voltage=50V, Case/Package=0402, Category="Ceramic Capacitors", ComponentLink1Description=https://datasheet.ciiva.com/15195/getdatasheetpartid-359682-15195636.pdf?src-supplier=Verical, ComponentLink1URL=https://datasheet.ciiva.com/15195/getdatasheetpartid-359682-15195636.pdf?src-supplier=Verical, ComponentLink2Description=https://datasheet.ciiva.com/29198/458761-da-01-en-vs-kondensator-0402-29198432.pdf?src-supplier=Conrad, ComponentLink2URL=https://datasheet.ciiva.com/29198/458761-da-01-en-vs-kondensator-0402-29198432.pdf?src-supplier=Conrad, ComponentLink3Description=https://datasheet.ciiva.com/26309/mlcc-catalogdownload2013-eng-26309005.pdf?src-supplier=Distrelec, ComponentLink3URL=https://datasheet.ciiva.com/26309/mlcc-catalogdownload2013-eng-26309005.pdf?src-supplier=Distrelec, Construction=Flat, Contact Plating=Tin, Depth=0.5mm, Height=0.5mm, Lead Free="Lead Free", Length=1mm, Material=Ceramic, Mount="Surface Mount", Packaging="Tape and Reel", Pricing 1="10000=0,00290, 20000=0,00230, 50000=0,00210, 100000=0,00190 (USD)", Pricing 2="1=0,10000, 10=0,01500, 50=0,00820, 100=0,00670, 500=0,00478, 1000=0,00375, 2500=0,00341, 5000=0,00314 (USD)", Pricing 3="1=0,10000, 10=0,00900, 50=0,00900, 100=0,00700, 500=0,00600, 1000=0,00500, 2500=0,00400, 10000=0,00300, 20000=0,00200 (USD)", Radiation Hardening=No, RoHS=Yes, RoHS Compliant=Yes, Series=CL, Stock 1=6530000, Stock 2=14692768, Stock 3=2909879, Supplier 1="Arrow Electronics", Supplier 2=Digi-Key, Supplier 3=Mouser, Supplier Part Number 1=CL05B103KB5NNNC, Supplier Part Number 2=1276-1028-1-ND, Supplier Part Number 3=187-CL05B103KB5NNNC, Thickness=0.022inch, Voltage Rating=50V, Voltage Rating (DC)=50V, Width=0.02inch
C14: "Cap Ceramic 0.0022uF 50V X7R 10% Pad SMD 0402 125C Automotive T/R AC0402KRX7R9BB222", Capacitance=2.2nF, Case Code (Imperial)=0402, Case Code (Metric)=1005, JLCPCB=C309129, Manufacturer=Yageo, Manufacturer Part Number=AC0402KRX7R9BB222, Max Operating Temperature=125°C, Min Operating Temperature=-55°C, Ratings=AEC-Q200, Supplier Part Number 1=69AH6526, Tolerance=10%, Voltage Rating=50V, Case/Package=0402, Category="Ceramic Capacitors", ComponentLink1Description=http://www.yageo.com/documents/recent/UPY-AC_NP0X7R_16V-to-630V_11.pdf?src-supplier=Digi-Key, ComponentLink1URL=http://www.yageo.com/documents/recent/UPY-AC_NP0X7R_16V-to-630V_11.pdf?src-supplier=Digi-Key, ComponentLink2Description=https://www.yageo.com/upload/media/product/productsearch/datasheet/mlcc/UPY-AC_NP0X7R_16V-to-630V_12.pdf?src-supplier=Digi-Key, ComponentLink2URL=https://www.yageo.com/upload/media/product/productsearch/datasheet/mlcc/UPY-AC_NP0X7R_16V-to-630V_12.pdf?src-supplier=Digi-Key, Mount="Surface Mount", Packaging="Tape and Reel", Pricing 1="10=0,03200, 25=0,02600, 50=0,02100, 100=0,01600 (USD)", Pricing 2="1=0,10000, 10=0,05000, 50=0,02700, 100=0,02210, 500=0,01576, 1000=0,01239, 2500=0,01126, 5000=0,01036 (USD)", Pricing 3="1=0,10000, 10=0,05600, 50=0,05600, 100=0,02500, 1000=0,01400, 10000=0,01000 (USD)", RoHS=Yes, RoHS Compliant=Yes, Stock 1=49560, Stock 2=49626, Stock 3=49159, Supplier 1=Newark, Supplier 2=Digi-Key, Supplier 3=Mouser, Supplier Part Number 2=311-3072-1-ND, Supplier Part Number 3=603-AC402KRX7R9BB222
D1 D2: "Green/Yellow-Green 0402 Light Emitting Diodes (LED) ROHS NCD0402C1", JLCPCB=C130722, Manufacturer="Foshan NationStar Optoelectronics", Manufacturer Part Number=NCD0402C1
  D2: ComponentLink1Description=Datasheet, ComponentLink1URL=https://datasheet.lcsc.com/lcsc/2008201033_Foshan-NationStar-Optoelectronics-NCD0402C1_C130722.pdf
D3: "Transistor Mosfet P-ch 12V 2.5A 3-PIN Tsmt T/r", Manufacturer=Rohm, Manufacturer Part Number=RQ5A025ZPTL, Supplier Part Number 1=755-RQ5A025ZPTL, Category=MOSFETs, Pricing 1="1=0,58000, 10=0,49900, 50=0,49900, 100=0,37300, 1000=0,24300, 10000=0,20200 (USD)", RoHS=Yes, Stock 1=4907, Supplier 1=Mouser
D4 D5 D6 D7: library part "D SRV05-4.TCT", "SEMTECH - SRV05-4.TCT - ESD Protection Device, TVS, 17.5 V, SOT-23, 6 Pins, 5 V, 300 W", Breakdown Voltage=6V, Capacitance=5pF, Case/Package=SOT-23, Clamping Voltage=17.5V, Current=5A, Leakage Current=5uA, Manufacturer=Semtech, Manufacturer Part Number=SRV05-4.TCT, Max Operating Temperature=125°C, Max Power Dissipation=300W, Min Operating Temperature=-55°C, Operating Supply Voltage=5V, Peak Pulse Current=12A, Power Line Protection=Yes, Supplier Part Number 1=6910883, Test Current=1mA, Category="TVS Diodes", Clamping Voltage-Max=17.5V, ComponentLink1Description=https://datasheet.ciiva.com/18065/getdatasheetpartid-93542-18065216.pdf?src-supplier=Verical, ComponentLink1URL=https://datasheet.ciiva.com/18065/getdatasheetpartid-93542-18065216.pdf?src-supplier=Verical, ComponentLink2Description=https://datasheet.ciiva.com/8029/srv05-4-8029973.pdf?src-supplier=Element14, ComponentLink2URL=https://datasheet.ciiva.com/8029/srv05-4-8029973.pdf?src-supplier=Element14, ComponentLink3Description=https://datasheet.ciiva.com/26787/srv05-4-tct-26787453.pdf?src-supplier=IIIC, ComponentLink3URL=https://datasheet.ciiva.com/26787/srv05-4-tct-26787453.pdf?src-supplier=IIIC, ComponentLink4Description=https://datasheet.ciiva.com/11193/srv05-4-11193639.pdf?src-supplier=Avnet, ComponentLink4URL=https://datasheet.ciiva.com/11193/srv05-4-11193639.pdf?src-supplier=Avnet, ComponentLink5Description=https://datasheet.ciiva.com/16396/srv05-4-16396600.pdf?src-supplier=Future+Electronics, ComponentLink5URL=https://datasheet.ciiva.com/16396/srv05-4-16396600.pdf?src-supplier=Future+Electronics, ComponentLink6Description=https://datasheet.ciiva.com/25955/srv05-4-25955769.pdf?src-supplier=Avnet+Europe, ComponentLink6URL=https://datasheet.ciiva.com/25955/srv05-4-25955769.pdf?src-supplier=Avnet+Europe, ComponentLink7Description=https://datasheet.ciiva.com/338/srv05-4-338860.pdf?src-supplier=Digi-Key, ComponentLink7URL=https://datasheet.ciiva.com/338/srv05-4-338860.pdf?src-supplier=Digi-Key, ComponentLink8Description=https://datasheet.ciiva.com/338/srv05-4-338861.pdf?src-supplier=Digi-Key, ComponentLink8URL=https://datasheet.ciiva.com/338/srv05-4-338861.pdf?src-supplier=Digi-Key, ComponentLink9Description=https://datasheet.ciiva.com/338/srv05-4-338862.pdf?src-supplier=Digi-Key, ComponentLink9URL=https://datasheet.ciiva.com/338/srv05-4-338862.pdf?src-supplier=Digi-Key, Depth=1.6mm, Direction=Unidirectional, ESD Protection=Yes, Height=1.15mm, Lead Free="Lead Free", Length=2.9mm, Max Breakdown Voltage=6V, Max Reverse Leakage Current=5uA, Min Breakdown Voltage=6V, Mount="Surface Mount", Number of Bidirectional Channels=4, Number of Channels=4, Number of Elements=1, Number of Pins=6, Packaging="Tape and Reel", Peak Pulse Power=300W, Polarity=Unidirectional, Pricing 1="5=1,18100, 25=0,88900, 50=0,77200, 125=0,72400, 250=0,69400 (USD)", Radiation Hardening=No, REACH SVHC="No SVHC", Reverse Breakdown Voltage=6V, Reverse Standoff Voltage=5V, RoHS=Yes, RoHS Compliant=Yes, Series="RailClamp®, SR", Stock 1=425, Supplier 1=RSComponents, Voltage=5V, Voltage Rating (DC)=5V, Width=1.6mm, Working Voltage=5V
J1: "Direct programming with TAG CONNECT 2030"
J2 J3: "Switch Tactile N.O. SPST Round Button Gull Wing 0.05A 12VDC 1.57N SMD T/R SKRKAEE020", JLCPCB=C115357, Manufacturer="Alps Electric", Manufacturer Part Number=SKRKAEE020, Supplier Part Number 1=79AH6587, Category="Tactile Switches", Pricing 1="4500=0,13500 (USD)", Pricing 2="1=0,76000, 10=0,67100, 50=0,60600, 100=0,51800, 1000=0,43900, 10000=0,37600 (USD)", RoHS=Yes, RoHS Compliant=Yes, Stock 1=31500, Stock 2=43207, Supplier 1=Newark, Supplier 2=Mouser, Supplier 3=RSComponents, Supplier Part Number 2=688-SKRKAEE020, Supplier Part Number 3=194714
J4: "Conn USB 3.1 Type C F 24 POS Solder RA SMD 24 Terminal 1 Port USB 3.1 T/R 105450-0101", JLCPCB=C134092, Manufacturer=Molex, Manufacturer Part Number=105450-0101, Category="USB Connectors", ComponentLink1Description=http://www.farnell.com/datasheets/2801634.pdf?src-supplier=Farnell, ComponentLink1URL=http://www.farnell.com/datasheets/2801634.pdf?src-supplier=Farnell, ComponentLink2Description=http://www.farnell.com/datasheets/2672741.pdf?src-supplier=Newark, ComponentLink2URL=http://www.farnell.com/datasheets/2672741.pdf?src-supplier=Newark, ComponentLink3Description=https://www.molex.com/pdm_docs/ps/PS-105448-001.pdf?src-supplier=Digi-Key, ComponentLink3URL=https://www.molex.com/pdm_docs/ps/PS-105448-001.pdf?src-supplier=Digi-Key, ComponentLink4Description=https://www.molex.com/pdm_docs/sd/1054500101_sd.pdf?src-supplier=Digi-Key, ComponentLink4URL=https://www.molex.com/pdm_docs/sd/1054500101_sd.pdf?src-supplier=Digi-Key, ComponentLink5Description=http://www.literature.molex.com/SQLImages/kelmscott/Molex/PDF_Images/987651-4081.PDF?src-supplier=Avnet, ComponentLink5URL=http://www.literature.molex.com/SQLImages/kelmscott/Molex/PDF_Images/987651-4081.PDF?src-supplier=Avnet, ComponentLink6Description=http://www.farnell.com/datasheets/2801634.pdf?src-supplier=Newark, ComponentLink6URL=http://www.farnell.com/datasheets/2801634.pdf?src-supplier=Newark, ComponentLink7Description=http://www.farnell.com/datasheets/2801634.pdf?src-supplier=Element14, ComponentLink7URL=http://www.farnell.com/datasheets/2801634.pdf?src-supplier=Element14, ComponentLink8Description=http://www.farnell.com/datasheets/2015275.pdf?src-supplier=Element14, ComponentLink8URL=http://www.farnell.com/datasheets/2015275.pdf?src-supplier=Element14, Pricing 1="1=2,36000, 10=1,98100, 25=1,94300, 100=1,88000, 250=1,81800, 500=1,75500, 1000=1,69300 (USD)", Pricing 2="5=2,95300, 15=2,60200, 65=2,46800, 325=2,04900, 650=1,99600 (USD)", Pricing 3="1=2,68000, 10=2,28300, 100=1,88600 (USD)", Pricing 4="1=2,65000, 10=2,27000, 50=2,27000, 100=1,87000, 500=1,72000, 1000=1,72000, 1300=1,48000, 2600=1,37000, 3900=1,30000, 9100=1,27000, 10000=1,30000, 24700=1,22000 (USD)", RoHS=Yes, Stock 1=1720, Stock 2=1, Stock 3=42891, Stock 4=76331, Supplier 1="Arrow Electronics", Supplier 2=RSComponents, Supplier 3=Digi-Key, Supplier 4=Mouser, Supplier Part Number 1=105450-0101, Supplier Part Number 2=9209199, Supplier Part Number 3=WM12856CT-ND, Supplier Part Number 4=538-105450-0101
J5: "Deck MicroSD card (TF card) Self bomb SMD SD Card Connectors ROHS", JLCPCB=C111196, Manufacturer=SOFNG, Manufacturer Part Number=TF-15x15
J8: "No-BOM solder jumper (test method)"
MK1: "WILLSEMI(Will Semicon) SMD MEMS Microphones ROHS WMM7040DTHN0", JLCPCB=C2937733, Manufacturer="WILLSEMI(Will Semicon)", Manufacturer Part Number=WMM7040DTHN0, ComponentLink1Description=Datasheet, ComponentLink1URL=https://datasheet.lcsc.com/lcsc/2204021130_WILLSEMI-Will-Semicon-WMM7040DTHN0-8-TR_C2937733.pdf
Q1: "Trans GP BJT NPN 30V 0.6A 3-Pin SOT-23 T/R", Case/Package=SOT-23-3, Collector Base Voltage (VCBO)=60V, Collector Emitter Breakdown Voltage=30V, Collector Emitter Saturation Voltage=1.6V, Current Rating=600mA, Emitter Base Voltage (VEBO)=5V, Frequency=250MHz, Manufacturer="ON Semiconductor", Manufacturer Part Number=MMBT2222LT1G, Max Operating Temperature=150°C, Max Power Dissipation=225mW, Min Operating Temperature=-55°C, Package Quantity=1, Power Dissipation=300mW, Supplier Part Number 1=7814222, Category=BJTs, Collector Emitter Voltage (VCEO)=30V, ComponentLink1Description=https://datasheet.ciiva.com/976/mmbt2222lt1-d-976368.pdf?src-supplier=Digi-Key, ComponentLink1URL=https://datasheet.ciiva.com/976/mmbt2222lt1-d-976368.pdf?src-supplier=Digi-Key, ComponentLink2Description=https://datasheet.ciiva.com/976/mmbt2222lt1-d-976369.pdf?src-supplier=Digi-Key, ComponentLink2URL=https://datasheet.ciiva.com/976/mmbt2222lt1-d-976369.pdf?src-supplier=Digi-Key, ComponentLink3Description=https://datasheet.ciiva.com/976/mmbt2222lt1-d-976370.pdf?src-supplier=Digi-Key, ComponentLink3URL=https://datasheet.ciiva.com/976/mmbt2222lt1-d-976370.pdf?src-supplier=Digi-Key, ComponentLink4Description=https://datasheet.ciiva.com/7972/mmbt2222lt1-d-7972376.pdf?src-supplier=Element14, ComponentLink4URL=https://datasheet.ciiva.com/7972/mmbt2222lt1-d-7972376.pdf?src-supplier=Element14, ComponentLink5Description=https://datasheet.ciiva.com/22664/1644026-22664155.pdf?src-supplier=Element14, ComponentLink5URL=https://datasheet.ciiva.com/22664/1644026-22664155.pdf?src-supplier=Element14, ComponentLink6Description=https://datasheet.ciiva.com/4721/mmbt2222lt1-d-80103-4721468.pdf?src-supplier=Mouser, ComponentLink6URL=https://datasheet.ciiva.com/4721/mmbt2222lt1-d-80103-4721468.pdf?src-supplier=Mouser, ComponentLink7Description=https://datasheet.ciiva.com/11198/mmbt2222lt1-d-11198974.pdf?src-supplier=Avnet, ComponentLink7URL=https://datasheet.ciiva.com/11198/mmbt2222lt1-d-11198974.pdf?src-supplier=Avnet, ComponentLink8Description=https://datasheet.ciiva.com/11201/mmbt2222lt1-d-11201758.pdf?src-supplier=Avnet, ComponentLink8URL=https://datasheet.ciiva.com/11201/mmbt2222lt1-d-11201758.pdf?src-supplier=Avnet, ComponentLink9Description=https://datasheet.ciiva.com/15224/getdatasheetpartid-91924-15224358.pdf?src-supplier=Verical, ComponentLink9URL=https://datasheet.ciiva.com/15224/getdatasheetpartid-91924-15224358.pdf?src-supplier=Verical, ComponentLink10Description=https://datasheet.ciiva.com/26115/mmbt2222lt1-d-26115112.pdf?src-supplier=Avnet+Europe, ComponentLink10URL=https://datasheet.ciiva.com/26115/mmbt2222lt1-d-26115112.pdf?src-supplier=Avnet+Europe, Contact Plating=Tin,Matte, Element Configuration=Single, Gain Bandwidth Product=250MHz, Height=1.11mm, hFE Min=100, Lead Free="Lead Free", Length=3.04mm, Max Breakdown Voltage=30V, Max Collector Current=600mA, Max Frequency=250MHz, Number of Elements=1, Number of Pins=3, Packaging="Tape and Reel", Polarity=NPN, Pricing 1="200=0,04200 (USD)", Radiation Hardening=No, REACH SVHC="No SVHC", RoHS=Yes, RoHS Compliant=Yes, Stock 1=1600, Supplier 1=RSComponents, Termination=SMD/SMT, Transition Frequency=250MHz, Voltage Rating (DC)=30V, Weight=0.01lb, Width=2.64mm
R1 R2 R3 R4 R5 R6 R8 R11 R13 R14 R21 R22 R23 R24 R25 R26 R27 R34 R35 R36 R37 R38 R39 R40 R43 R45: "Res Thick Film 0402 10K Ohm 1% 0.063W(1/16W) ±100ppm/C Pad SMD Automotive T/R AC0402FR-0710KL", Case Code (Imperial)=0402, Case Code (Metric)=1005, JLCPCB=C144807, Manufacturer=Yageo, Manufacturer Part Number=AC0402FR-0710KL, Max Operating Temperature=155°C, Max Power Dissipation=63mW, Min Operating Temperature=-55°C, Power Rating=62.5mW, Resistance=10kR, Resistor Type="Thick Film", Temperature Coefficient=100ppm/°C, Tolerance=1%, Voltage Rating=50V, Case/Package=0402, Category="Chip SMD Resistors", ComponentLink1Description=https://datasheet.ciiva.com/12656/pyu-ac-51-rohs-l-2-12656634.pdf?src-supplier=Mouser, ComponentLink1URL=https://datasheet.ciiva.com/12656/pyu-ac-51-rohs-l-2-12656634.pdf?src-supplier=Mouser, Construction=Rectangular, Depth=0.5mm, Features="Moisture Resistant,Automotive AEC-Q200", Height=0.015inch, Lead Free="Lead Free", Length=0.039inch, Military Standard=Not, Number of Terminations=2, Packaging="Tape and Reel", Pricing 1="1=0,08140, 10=0,02850, 25=0,02750 (USD)", Pricing 2="10000=0,00200 (GBP)", Pricing 3="1=0,10000, 10=0,02000, 100=0,00830, 1000=0,00371, 2500=0,00322, 5000=0,00266 (USD)", Pricing 4="1=0,10000, 10=0,01500, 50=0,01500, 100=0,00700, 1000=0,00300, 5000=0,00200, 10000=0,00200 (USD)", RoHS=Yes, RoHS Compliant=Yes, Series=AC, Size Code=0402, Stock 1=46, Stock 2=17000, Stock 3=1574588, Stock 4=3990115, Supplier 1="Arrow Electronics", Supplier 2=RSComponents, Supplier 3=Digi-Key, Supplier 4=Mouser, Supplier Part Number 1=AC0402FR-0710KL, Supplier Part Number 2=1977965, Supplier Part Number 3=YAG3436CT-ND, Supplier Part Number 4=603-AC0402FR-0710KL, Termination=SMD/SMT, Width=0.02inch
R7 R12: "Res Thick Film 0402 1K Ohm 1% 0.063W(1/16W) ±100ppm/C Pad SMD Automotive T/R", Case Code (Imperial)=0402, Case Code (Metric)=1005, Manufacturer=Yageo, Manufacturer Part Number=AC0402FR-071KL, Max Operating Temperature=155°C, Max Power Dissipation=63mW, Min Operating Temperature=-55°C, Package Quantity=1, Power Rating=62.5mW, Resistance=1kR, Resistor Type="Thick Film", Temperature Coefficient=100ppm/°C, Tolerance=1%, Voltage Rating=50V, Case/Package=0402, Category="Chip SMD Resistors", ComponentLink1Description=http://www.mouser.com/ds/2/447/yageodocoutput-1111992.pdf?src-supplier=Mouser, ComponentLink1URL=http://www.mouser.com/ds/2/447/yageodocoutput-1111992.pdf?src-supplier=Mouser, ComponentLink2Description=http://www.yageo.com/NewPortal/yageodocoutput?fileName=/pdf/R-Chip/PYu-AC_51_RoHS_L_6.pdf&src-supplier=Digi-Key, ComponentLink2URL=http://www.yageo.com/NewPortal/yageodocoutput?fileName=/pdf/R-Chip/PYu-AC_51_RoHS_L_6.pdf&src-supplier=Digi-Key, ComponentLink3Description=http://www.yageo.com/documents/recent/PYu-AC_51_RoHS_L_2_revised.pdf?src-supplier=Future+Electronics, ComponentLink3URL=http://www.yageo.com/documents/recent/PYu-AC_51_RoHS_L_2_revised.pdf?src-supplier=Future+Electronics, Construction=Rectangular, Depth=0.5mm, Features="Moisture Resistant,Automotive AEC-Q200,Anti-Sulfur", Height=0.015inch, Lead Free="Lead Free", Length=0.039inch, Military Standard=Not, Number of Terminations=2, Packaging="Tape and Reel", Pricing 1="1=0,05050, 10=0,03670, 25=0,01910, 100=0,00800, 250=0,00790 (USD)", Pricing 2="5000=0,00300 (GBP)", Pricing 3="1=0,10000, 10=0,02000, 100=0,00830, 1000=0,00371, 2500=0,00322, 5000=0,00266 (USD)", Pricing 4="1=0,10000, 10=0,01500, 50=0,01500, 100=0,00700, 1000=0,00300, 10000=0,00200 (USD)", RoHS=Yes, RoHS Compliant=Yes, Series=AC, Size Code=0402, Stock 1=269, Stock 2=109000, Stock 3=1440182, Stock 4=1563596, Supplier 1="Arrow Electronics", Supplier 2=RSComponents, Supplier 3=Digi-Key, Supplier 4=Mouser, Supplier Part Number 1=AC0402FR-071KL, Supplier Part Number 2=1977971P, Supplier Part Number 3=311-1KLBCT-ND, Supplier Part Number 4=603-AC0402FR-071KL, Termination=SMD/SMT, Width=0.02inch
R9 R10: "Res General Purpose Thick Film 0402 150 Ohm 1% 1/16W ±100ppm/°C Molded SMD Paper T/R RC0402FR-07150RL", Case Code (Imperial)=0402, Case Code (Metric)=1005, JLCPCB=C138054, Manufacturer=Yageo, Manufacturer Part Number=RC0402FR-07150RL, Max Operating Temperature=155°C, Max Power Dissipation=63mW, Min Operating Temperature=-55°C, Package Quantity=1, Power Rating=62.5mW, Resistance=150R, Resistance Tolerance=1%, Resistor Type="Thick Film", Temperature Coefficient=100ppm/°C, Voltage Rating=50V, Case/Package=0402, Category="Chip SMD Resistors", ComponentLink1Description=https://datasheet.ciiva.com/11808/0900766b80c66297-11808422.pdf?src-supplier=RSComponents, ComponentLink1URL=https://datasheet.ciiva.com/11808/0900766b80c66297-11808422.pdf?src-supplier=RSComponents, ComponentLink2Description=https://datasheet.ciiva.com/7983/1018594-7983495.pdf?src-supplier=Element14, ComponentLink2URL=https://datasheet.ciiva.com/7983/1018594-7983495.pdf?src-supplier=Element14, ComponentLink3Description=https://datasheet.ciiva.com/2453/pyu-r-int-thick-7-2453374.pdf?src-supplier=Digi-Key, ComponentLink3URL=https://datasheet.ciiva.com/2453/pyu-r-int-thick-7-2453374.pdf?src-supplier=Digi-Key, ComponentLink4Description=https://datasheet.ciiva.com/2453/pyu-r-int-thick-7-2453375.pdf?src-supplier=Digi-Key, ComponentLink4URL=https://datasheet.ciiva.com/2453/pyu-r-int-thick-7-2453375.pdf?src-supplier=Digi-Key, ComponentLink5Description=https://datasheet.ciiva.com/2453/pyu-r-int-thick-7-2453373.pdf?src-supplier=Digi-Key, ComponentLink5URL=https://datasheet.ciiva.com/2453/pyu-r-int-thick-7-2453373.pdf?src-supplier=Digi-Key, ComponentLink6Description=https://datasheet.ciiva.com/5558/pyu-rc0402-51-rohs-l-6-r-5558110.pdf?src-supplier=Mouser, ComponentLink6URL=https://datasheet.ciiva.com/5558/pyu-rc0402-51-rohs-l-6-r-5558110.pdf?src-supplier=Mouser, ComponentLink7Description=https://datasheet.ciiva.com/7849/1018594-7849838.pdf?src-supplier=Element14, ComponentLink7URL=https://datasheet.ciiva.com/7849/1018594-7849838.pdf?src-supplier=Element14, ComponentLink8Description=https://datasheet.ciiva.com/7849/1018594-7849839.pdf?src-supplier=Element14, ComponentLink8URL=https://datasheet.ciiva.com/7849/1018594-7849839.pdf?src-supplier=Element14, ComponentLink9Description=https://datasheet.ciiva.com/16740/pyu-rc0402-51-rohs-l-6-r-16740923.pdf?src-supplier=Future+Electronics, ComponentLink9URL=https://datasheet.ciiva.com/16740/pyu-rc0402-51-rohs-l-6-r-16740923.pdf?src-supplier=Future+Electronics, ComponentLink10Description=https://datasheet.ciiva.com/15189/getdatasheetpartid-330680-15189357.pdf?src-supplier=Verical, ComponentLink10URL=https://datasheet.ciiva.com/15189/getdatasheetpartid-330680-15189357.pdf?src-supplier=Verical, Construction=Rectangular, Depth=0.5mm, Features="Moisture Resistant", Height=0.016inch, Lead Free="Lead Free", Length=1mm, Military Standard=Not, Number of Terminations=2, Packaging="Tape and Reel", Pricing 1="10000=0,00140 (USD)", Pricing 2="10000=0,00200, 50000=0,00200, 100000=0,00200, 200000=0,00200, 400000=0,00200 (GBP)", Pricing 3="1=0,10000, 10=0,01500, 100=0,00610, 1000=0,00275, 2500=0,00239, 5000=0,00197 (USD)", REACH SVHC="No SVHC", RoHS=Yes, RoHS Compliant=Yes, Series=RC, Stock 1=70000, Stock 2=10800, Stock 3=2629290, Supplier 1="Arrow Electronics", Supplier 2=RSComponents, Supplier 3=Digi-Key, Supplier Part Number 1=RC0402FR-07150RL, Supplier Part Number 2=1987666, Supplier Part Number 3=311-150LRCT-ND, Technology="THICK FILM", Termination=SMD/SMT, Tolerance=1%, Width=0.02inch, Working Voltage=50V
R15 R16 R41 R42: "Res General Purpose Thick Film 0402 49.9K Ohm 1% 1/16W ±100ppm/°C Molded SMD Paper T/R RC0402FR-0749K9L", Case Code (Imperial)=0402, Case Code (Metric)=1005, JLCPCB=C137969, Manufacturer=Yageo, Manufacturer Part Number=RC0402FR-0749K9L, Max Operating Temperature=155°C, Max Power Dissipation=63mW, Min Operating Temperature=-55°C, Power Rating=62.5mW, Resistance=49.9kR, Resistor Type="Thick Film", Temperature Coefficient=100ppm/°C, Tolerance=1%, Voltage Rating=50V, Case/Package=0402, Category="Chip SMD Resistors", ComponentLink1Description=https://datasheet.ciiva.com/17071/pyu-rc0402-51-rohs-l-6-r-17071066.pdf?src-supplier=Future+Electronics, ComponentLink1URL=https://datasheet.ciiva.com/17071/pyu-rc0402-51-rohs-l-6-r-17071066.pdf?src-supplier=Future+Electronics, Construction=Rectangular, Depth=0.5mm, Features="Moisture Resistant", Lead Free="Lead Free", Length=1mm, Military Standard=Not, Number of Terminations=2, Packaging="Tape and Reel", Pricing 1="10000=0,00180, 30000=0,00160, 50000=0,00140, 100000=0,00140 (USD)", Pricing 2="10000=0,00200, 50000=0,00200, 100000=0,00200, 200000=0,00200, 400000=0,00200 (GBP)", Pricing 3="1=0,10000, 10=0,01500, 100=0,00610, 1000=0,00275, 2500=0,00239, 5000=0,00197 (USD)", Pricing 4="1=0,10000, 10=0,01800, 50=0,01800, 100=0,00800, 1000=0,00500, 10000=0,00200 (USD)", RoHS=Yes, RoHS Compliant=Yes, Series=RC, Size Code=0402, Stock 1=3590000, Stock 2=9900, Stock 3=8421822, Stock 4=1268211, Supplier 1="Arrow Electronics", Supplier 2=RSComponents, Supplier 3=Digi-Key, Supplier 4=Mouser, Supplier Part Number 1=RC0402FR-0749K9L, Supplier Part Number 2=1987804, Supplier Part Number 3=311-49.9KLRDKR-ND, Supplier Part Number 4=603-RC0402FR-0749K9L, Termination=SMD/SMT, Voltage Rating (DC)=50V